# Altium PCB Battery 3.7 PCB.PcbDoc
Units mil, origin at the board's own origin, x right, y up, seen from the top; angles counter-clockwise.
Board outline 7400 x 4100 mil, 2 copper layers (Top Layer, Bottom Layer); 13 components, 8 nets, 31 pads, 0 vias.
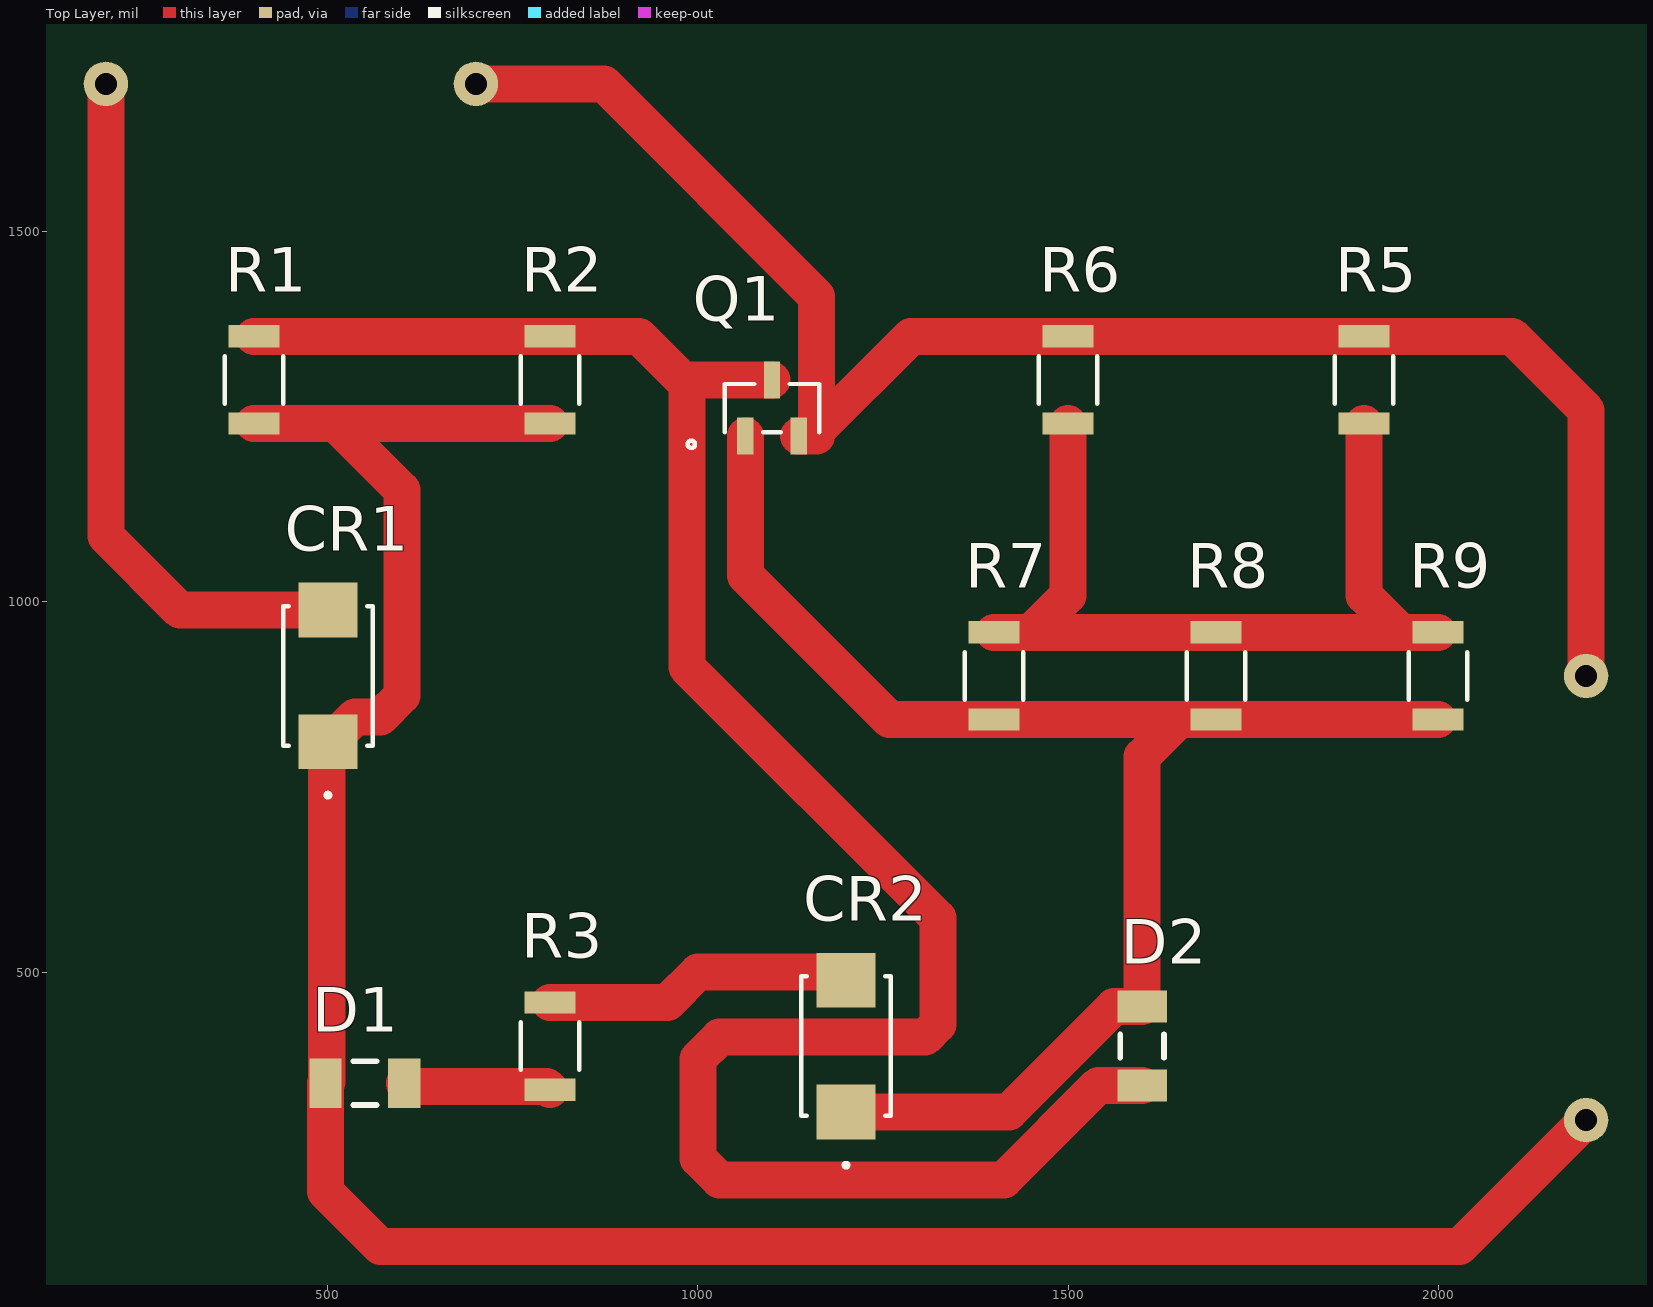
[diagram p0: Top Layer view]
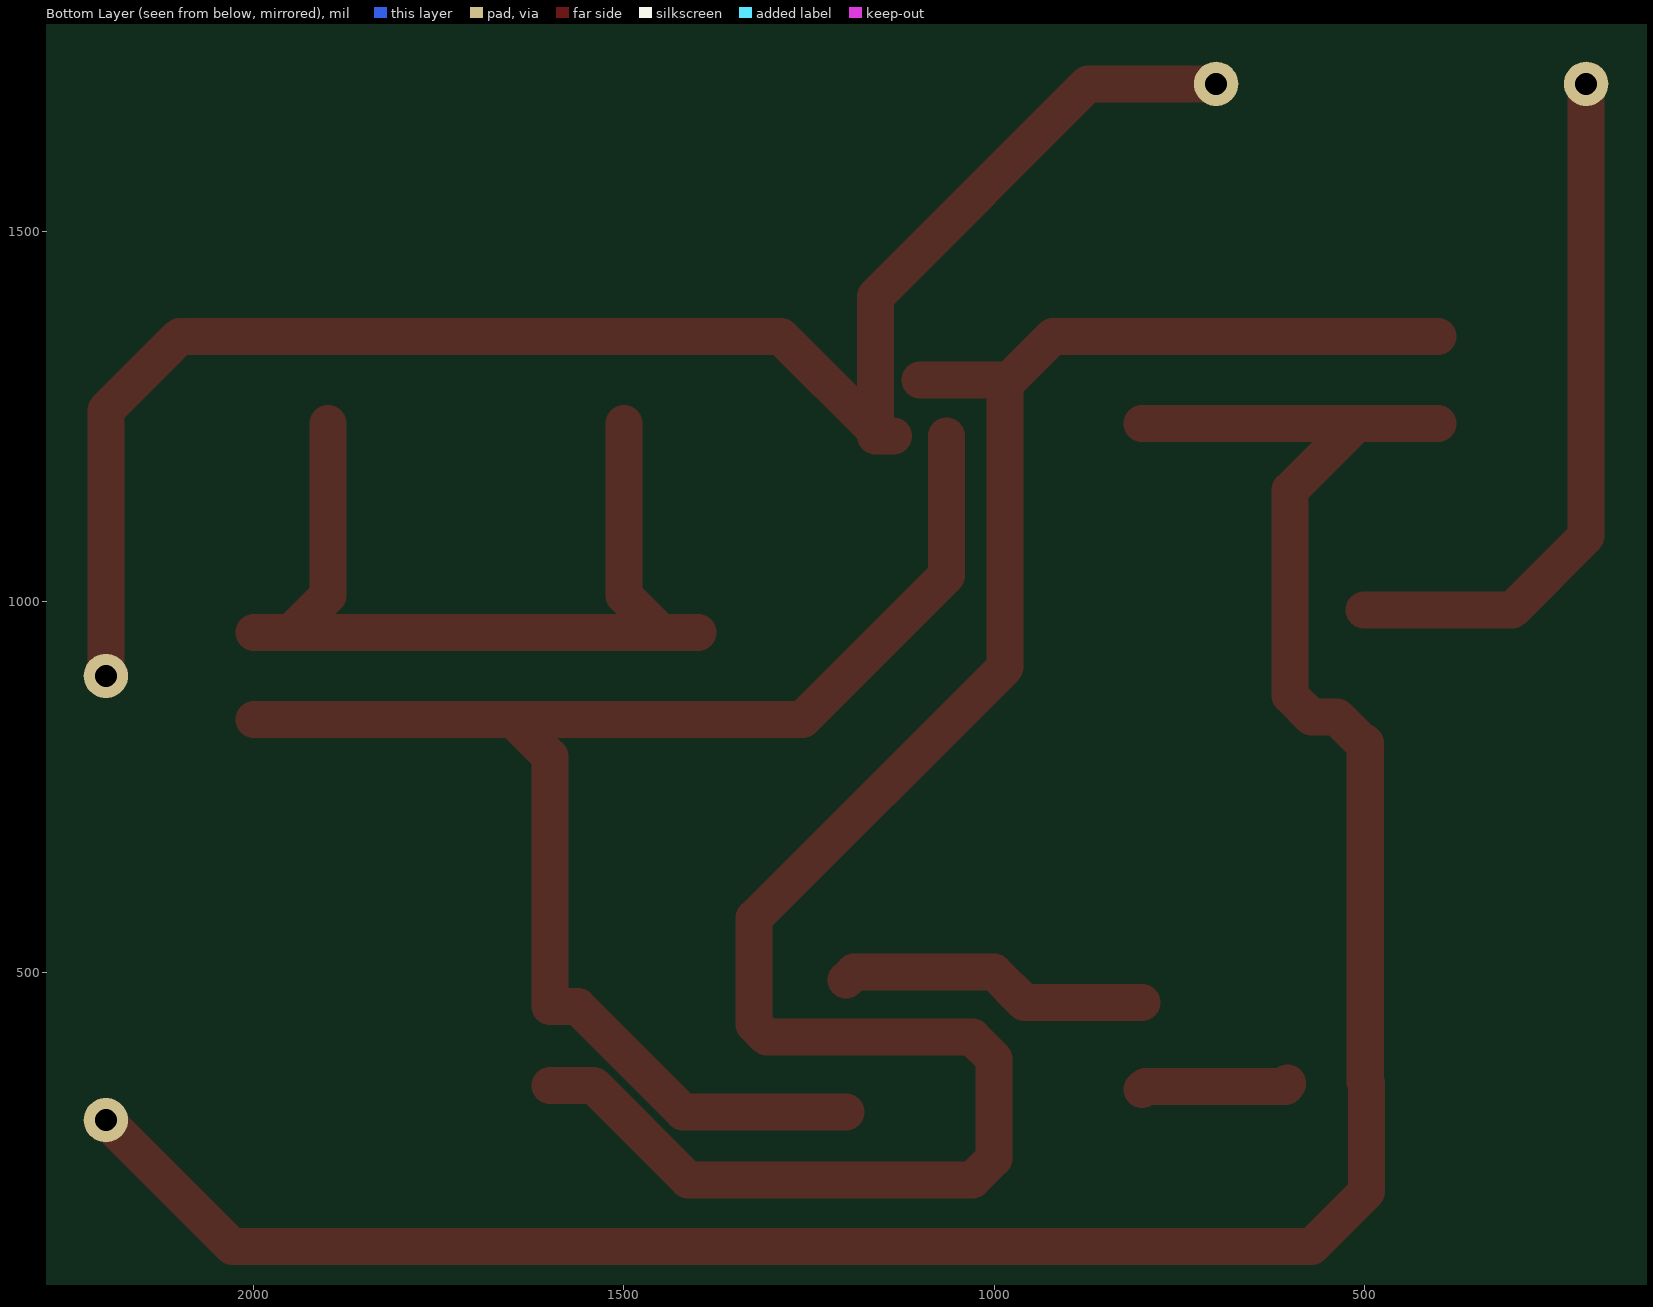
[diagram p1: Bottom Layer view, seen from below]
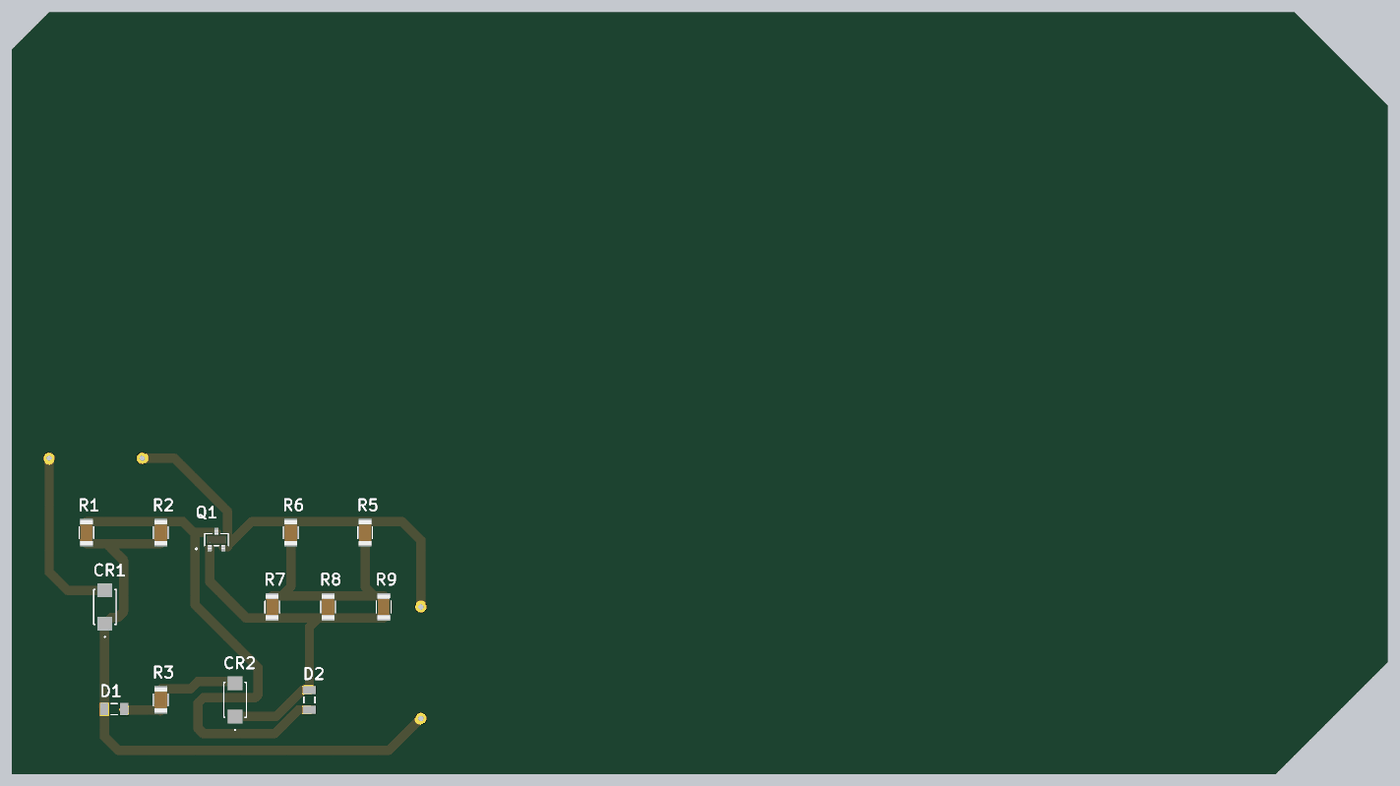
[diagram p2: 3D render of the assembled board from above, using the file's embedded part models]

## Layer stack, top to bottom
Top Solder: solder mask 0.4, Solder Resist, Dk 3.5
Top Layer: signal copper 1.4
Dielectric 1: dielectric 12.6, FR-4, Dk 4.8
Bottom Layer: signal copper 1.4
Bottom Solder: solder mask 0.4, Solder Resist, Dk 3.5

## Board outline
0,0 0,3900 200,4100 6900,4100 7400,3600 7400,600 6800,0

## Design rules (kind name [scope] priority, off if disabled: settings)
Clearance [All] p1: gap=10 ignorepadtopadclearanceinfootprint=FALSE except(0: Arc-Hole Track-Hole SMDPad-Hole THPad-Hole Via-Hole Fill-Hole Poly-Hole Region-Hole Text-Hole)
PolygonConnect [All] p1: connectstyle=Relief reliefconductorwidth=10 reliefentries=4 polygonreliefangle="90 Angle" airgapwidth=10
RoutingVias [All] p1: holewidth=28 width=50 viastyle="Through Hole" minholewidth=28 minwidth=50 maxholewidth=28 maxwidth=50
SolderMaskExpansion [All] p1: expansion=4 istentingtop=FALSE
Width [All] p1: maxlimit=50 minlimit=50 preferedwidth=50
30 further rules are at their usual default settings.

## Components (designator, comment, footprint, x,y, rotation, side; value= is the part's Value field where it differs from the comment)
CR1 "1N4007(M7)" CR_1N4007(M7)_YTS 500,900 r90 top
CR2 "1N4007(M7)" CR_1N4007(M7)_YTS 1200,400 r90 top
D1 "LED_R" C1206 550,350 r0 top
D2 "LED_R" C1206 1600,400 r90 top
Q1 "DDTC123ECA-7-F" SOT23_DIO 1100,1262 r0 top
R1 "ESR18EZPJ431" RES_R1206_ROM 400,1300 r90 top
R2 "ESR18EZPJ431" RES_R1206_ROM 800,1300 r90 top
R3 "ESR18EZPJ431" RES_R1206_ROM 800,400 r90 top
R5 "ESR18EZPJ431" RES_R1206_ROM 1900,1300 r90 top
R6 "ESR18EZPJ431" RES_R1206_ROM 1500,1300 r90 top
R7 "ESR18EZPJ431" RES_R1206_ROM 1400,900 r90 top
R8 "ESR18EZPJ431" RES_R1206_ROM 1700,900 r90 top
R9 "ESR18EZPJ431" RES_R1206_ROM 2000,900 r90 top

## Footprints (in the part's own frame and the unit in brackets; to place one, negate y for a bottom-side part, rotate by r counter-clockwise, add the part's x,y. Pads: shape width x height; smd on the part's side, far side on the other; paste and mask are expansions set on the pad)
C1206 [mm] "Chip Capacitor, Body 3.2x1.6mm, IPC High Density"
  rect 1.1x1.7 smd: 1(-1.35,0) 2(1.35,0)
  silkscreen extent -0.4,-0.75 0.4,0.75, body extent -1.7,-0.9 1.7,0.9, height 1.3
CR_1N4007(M7)_YTS [mil]
  rect 74x80 smd paste+0 mask+0: 1(-89,0) 2(89,0)
  silkscreen extent -164,-61 94,61, body extent 0,0 10,10, height 10
RES_R1206_ROM [mil]
  rect 30x68.9 smd paste+0 mask+0: 1(-59,0) 2(59,0)
  silkscreen extent -32,-39 32,39, body extent -66,-34 66,34, height 26
SOT23_DIO [mil]
  rect 22x50 smd paste+0 mask+0: 1(-36.02,-38) 2(36.02,-38) 3(0,38)
  silkscreen extent -114,-54 64,32, body extent -59,-49 59,49, height 41

## Part data
CR1 CR2: "No Description Available", Mfr_Name="UMW(Youtai Semiconductor Co., Ltd.)", Copyright="Copyright (C) 2022 Ultra Librarian. All rights reserved.", Manufacturer_Part_Number=1N4007(M7), RefDes=RefDes, Type=DEV
D1 D2: library part LED0, "Typical INFRARED GaAs LED", LatestRevisionDate=08-Jul-2005, LatestRevisionNote="Mech Layer 1 removed.", PackageDescription="LED; 2 Leads", PackageReference=LED-0, Published=8-Jun-2000, Publisher="Altium Limited"
Q1: "No Description Available", Mfr_Name="Diodes Inc", Copyright="Copyright (C) 2022 Ultra Librarian. All rights reserved.", Manufacturer_Part_Number=DDTC123ECA-7-F, RefDes=RefDes, Type=DEV
R1 R2 R3 R5 R6 R7 R8 R9: "No Description Available", Mfr_Name="ROHM Semiconductor", Copyright="Copyright (C) 2022 Ultra Librarian. All rights reserved.", Manufacturer_Part_Number=ESR18EZPJ431, RefDes=RefDes, Type=DEV

## Free pads (board coordinates)
  round 60 hole 30: 2(700,1700) 3(200,1700) 4(2200,300) 5(2200,900)

## Nets (pads, with @x,y where several pads share a name; then routed paths per layer and width w, separated by ;. In a path a pad name is that pad's centre, name@x,y a point inside that pad or via, vN(x,y) a via of type N, cw(c..) or ccw(c..) an arc to the next point about the centre after c; other vN are vias at no path point)
3V: CR1.1 D1.1 pad.4 R1.1 R2.1 | length 3344.4
  Top Layer w50: R1.1 510,1241 ; R2.1 510,1241 ; pad.4 2029,129 571,129 496.85,203.15 D1.1 498.43,351.57 498.43,809.42 CR1.1 503,811 536.33,844.33 570.71,844.33 600,873.62 600,1151 510,1241
5V: CR1.2 pad.3 | length 952.4
  Top Layer w50: pad.3 200,1089 300,989 CR1.2
GND: pad.2 pad.5 Q1.2 R5.2 R6.2 | length 2295.2
  Top Layer w50: pad.2 873,1700 1160,1413 1160,1231 ; Q1.2 1153,1224 ; pad.5 2200,1259 2100,1359 R5.2 R6.2 1288,1359 1160,1231 ; 1153,1224 1160,1231 ; 1153,1224 1160,1224 1160,1231
NetCR2_1: CR2.1 D2.2 Q1.1 R7.1 R8.1 R9.1 | length 2072.2
  Top Layer w50: Q1.1 1063.98,1036.02 1259,841 R7.1 1650,841 ; CR2.1 1420,311 1562.15,453.15 D2.2 1600,791 1650,841 ; R9.1 R8.1 1650,841
NetCR2_2: CR2.2 R3.2 | length 421.5
  Top Layer w50: R3.2 959,459 1000,500 1189,500 CR2.2
NetD1_2: D1.2 R3.1 | length 201.3
  Top Layer w50: D1.2 603.15,348.85 606.5,345.5 795.5,345.5 R3.1
NetD2_1: D2.1 Q1.3 R1.2 R2.2 | length 2880.9
  Top Layer w50: R1.2 R2.2 920.22,1359 979.22,1300 ; Q1.3 979.22,1300 ; D2.1 1541,346.85 1413.15,219 1029.29,219 1000,248.29 1000,382.71 1029.29,412 1307,412 1324,429 1324,573 985,912 985,1294.22 979.22,1300
NetR5_1: R5.1 R6.1 R7.2 R8.2 R9.2 | length 1205.4
  Top Layer w50: R7.2 1450,959 ; R6.1 1500,1009 1450,959 ; R5.1 1900,1009 1950,959 ; R9.2 1950,959 ; 1450,959 R8.2 1950,959